# EAGLE board pcb_final (EAGLE 9.6.2)
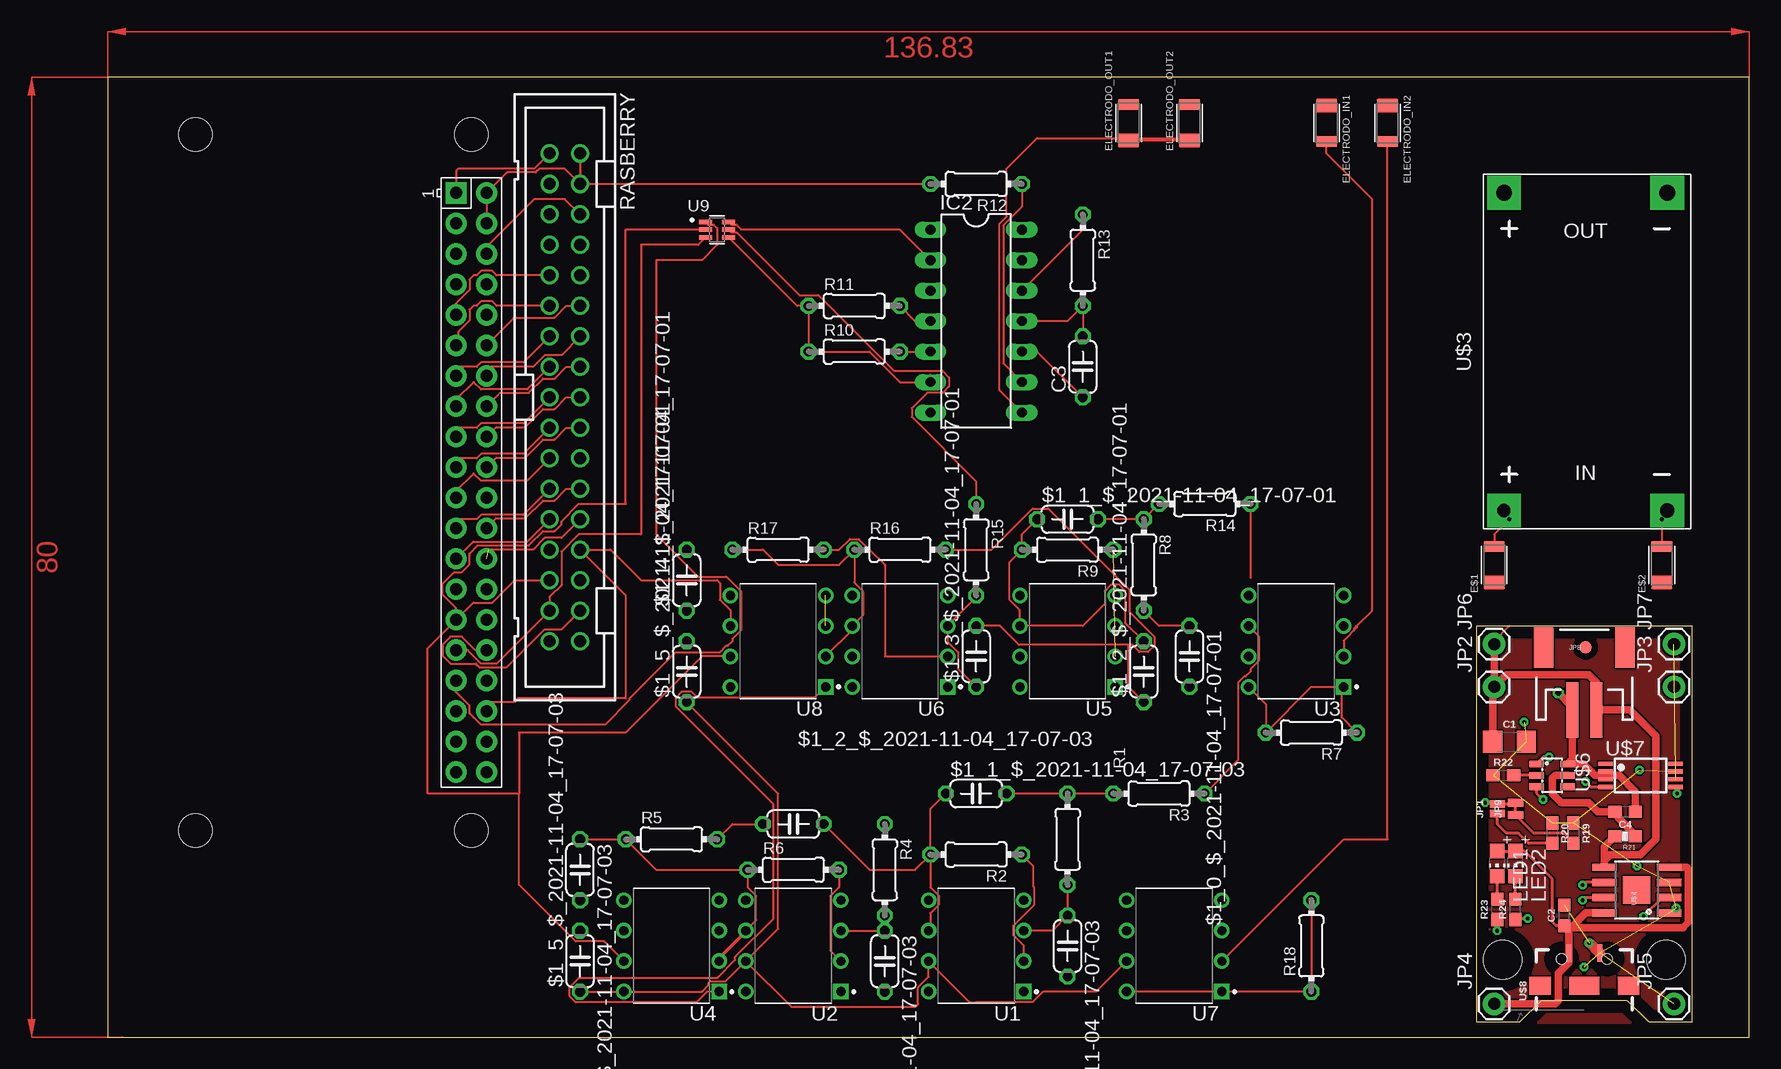
[diagram p0: board, top side]
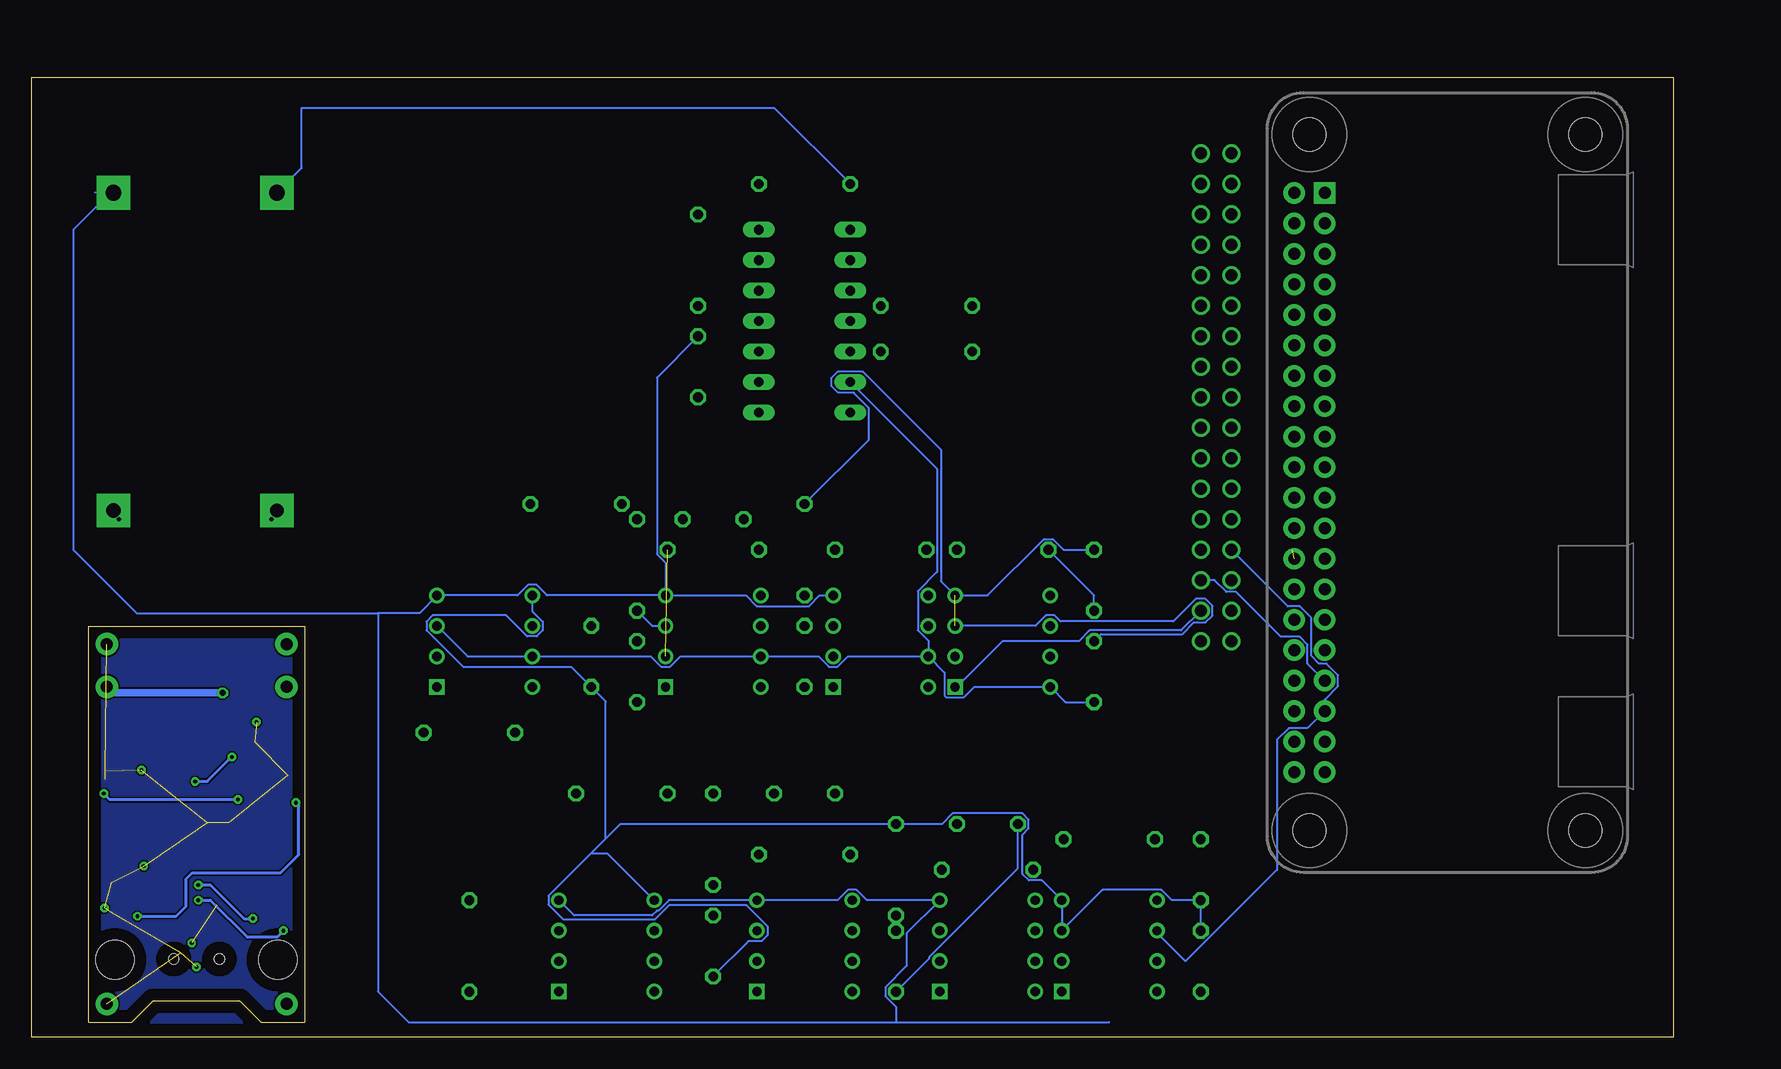
[diagram p1: board, bottom side, seen from below]

Size 136.83 x 80 mm. Coordinates in mm from the lower left corner, seen from the top.
Outline: 0,0 136.83,0 136.83,80 0,80 0,0
Outline: 132.08,1.27 132.08,34.27 114.08,34.27 114.08,1.27 117.68,1.27 119.48,3.07 126.68,3.07 128.48,1.27 132.08,1.27
Copper layers (1*16): Top 0.035mm / dielectric 1.5mm / Bottom 0.035mm
Design rules "default": minimum track width 6mil, minimum drill 0.35mm, track to track 6mil, track to pad 6mil, pad to pad 6mil, via to via 6mil, smd to smd 6mil, copper to edge 40mil, drill to drill 6mil, minimum pad ring 10mil, minimum via ring 8mil, stop-mask expansion 4mil, vias tented up to drill 0mil, thermal gap 10mil
Holes 3.2 mm at 129.88,6.47 116.28,6.47

## Footprints (pad centres in the part's own frame; a part is rotated, then mirrored left to right if it is on the bottom)
C050-024X044 = drill 0.813 octagon: 1 -2.54,0; 2 2.54,0
1206 = smd 1.6 x 1.8: 1 -1.4,0; 2 1.4,0
0603 = smd 1.1 x 1: 1 -0.85,0; 2 0.85,0
RESC3115X65N_1623693-1 = smd 1.09 x 1.77: 1 -1.465,0 | smd 0.94 x 1.77: 2 1.54,0
ICL8038 = drill 0.813 long: 1 -7.62,-3.81; 2 -5.08,-3.81; 3 -2.54,-3.81; 4 0,-3.81; 5 2.54,-3.81; 6 5.08,-3.81; 7 7.62,-3.81; 8 7.62,3.81; 9 5.08,3.81; 10 2.54,3.81; 11 0,3.81; 12 -2.54,3.81; 13 -5.08,3.81; 14 -7.62,3.81
SMT-JUMPER_2_NO_NO-SILK = smd 0.635 x 1.27: 1 -0.406,0; 2 0.406,0
1X01 = drill 1.016 pad 1.88: 1 0,0
JST-2-SMD = smd 1 x 4.6: 1 -1,-3.7; 2 1,-3.7 | smd 1.6 x 3.4: NC1 -3.4,1.5; NC2 3.4,1.5
SMT-JUMPER_2_NC_TRACE_NO-SILK = smd 0.635 x 1.27: 1 -0.508,0; 2 0.508,0
CHIP-LED0805 = smd 1.2 x 1.2: A 0,-1.05; C 0,1.05
0204/7 = drill 0.813 octagon: 1 -3.81,0; 2 3.81,0
0603-RES = smd 1.1 x 1: 1 -0.85,0; 2 0.85,0
PAK100/2500-34 = drill 1 pad 1.422: 1 -20.32,-1.27; 2 -20.32,1.27; 3 -17.78,-1.27; 4 -17.78,1.27; 5 -15.24,-1.27; 6 -15.24,1.27; 7 -12.7,-1.27; 8 -12.7,1.27; 9 -10.16,-1.27; 10 -10.16,1.27; 11 -7.62,-1.27; 12 -7.62,1.27; 13 -5.08,-1.27; 14 -5.08,1.27; 15 -2.54,-1.27; 16 -2.54,1.27; 17 0,-1.27; 18 0,1.27; 19 2.54,-1.27; 20 2.54,1.27; 21 5.08,-1.27; 22 5.08,1.27; 23 7.62,-1.27; 24 7.62,1.27; 25 10.16,-1.27; 26 10.16,1.27; 27 12.7,-1.27; 28 12.7,1.27; 29 15.24,-1.27; 30 15.24,1.27; 31 17.78,-1.27; 32 17.78,1.27; 33 20.32,-1.27; 34 20.32,1.27
DIP794W45P254L959H508Q8 = drill 0.78 pad 1.13 square: 1 -3.97,3.81 | drill 0.78 pad 1.13: 2 -3.97,1.27; 3 -3.97,-1.27; 4 -3.97,-3.81; 5 3.97,-3.81; 6 3.97,-1.27; 7 3.97,1.27; 8 3.97,3.81
SOT65P210X110-6N = smd 1.19 x 0.4: 1 -0.96,0.65; 2 -0.96,0; 3 -0.96,-0.65; 4 0.96,-0.65; 5 0.96,0; 6 0.96,0.65
RASPBERRYPI_BASTELSTUBE_V13_RASPI_BOARD_B+_FULL = drill 1 pad 1.778 square: 1 8.37,25.23 | drill 1 pad 1.778: 2 8.37,27.77; 3 10.91,25.23; 4 10.91,27.77; 5 13.45,25.23; 6 13.45,27.77; 7 15.99,25.23; 8 15.99,27.77; 9 18.53,25.23; 10 18.53,27.77; 11 21.07,25.23; 12 21.07,27.77; 13 23.61,25.23; 14 23.61,27.77; 15 26.15,25.23; 16 26.15,27.77; 17 28.69,25.23; 18 28.69,27.77; 19 31.23,25.23; 20 31.23,27.77; 21 33.77,25.23; 22 33.77,27.77; 23 36.31,25.23; 24 36.31,27.77; 25 38.85,25.23; 26 38.85,27.77; 27 41.39,25.23; 28 41.39,27.77; 29 43.93,25.23; 30 43.93,27.77; 31 46.47,25.23; 32 46.47,27.77; 33 49.01,25.23; 34 49.01,27.77; 35 51.55,25.23; 36 51.55,27.77; 37 54.09,25.23; 38 54.09,27.77; 39 56.63,25.23; 40 56.63,27.77 | hole 2.75: 3.5,3.5; 3.5,26.5; 61.5,3.5; 61.5,26.5
DC-DC-STEP-UP-MT3608 = drill 1.1 pad 2.8 square: IN+ -13.24,6.81 | drill 1.2 pad 2.8 square: IN- -13.24,-6.81 | drill 1.3 pad 2.8 square: OUT+ 13.24,6.81; OUT- 13.24,-6.81
SOIC-8 = smd 0.61 x 2.057: 1 -2.07,-2.892; 2 -0.8,-2.892; 3 0.47,-2.892; 4 1.74,-2.892; 5 1.74,2.492; 6 0.47,2.492; 7 -0.8,2.492; 8 -2.07,2.492 | smd 2.286 x 2.286: EPAD -0.165,-0.2
FIDUCIAL_1MM = smd 1 x 1: 1 0,0
SOT23-6L = smd 0.55 x 1.2: 1 -0.95,-1.3; 2 0,-1.3; 3 0.95,-1.3; 4 0.95,1.3; 5 0,1.3; 6 -0.95,1.3
TSSOP8 = smd 1.2 x 0.35: 1 -2.925,0.975; 2 -2.925,0.325; 3 -2.925,-0.325; 4 -2.925,-0.975; 5 2.925,-0.975; 6 2.925,-0.325; 7 2.925,0.325; 8 2.925,0.975
USB-MICROB-POWERONLY = smd 1.45 x 0.4: GND 1.455,-1.3; VBUS 1.455,1.3 | smd 1.5 x 1.8: SHIELD1 -1.27,3.685; SHIELD2 -1.27,-3.685 | smd 1.5 x 2.5: SHIELD3 -1.27,0 | hole 0.85: 0.93,1.9; 0.93,-1.9

## Placement (x,y rotation side)
$1_0_$_2021-11-04_17-07-01  100p  [C050-024X044]  90.17,31.75 270 top
$1_0_$_2021-11-04_17-07-03  100p  [C050-024X044]  80.01,7.62 270 top
$1_1_$_2021-11-04_17-07-01  200p  [C050-024X044]  80.01,43.18 0 top
$1_1_$_2021-11-04_17-07-03  200p  [C050-024X044]  72.39,20.32 0 top
$1_2_$_2021-11-04_17-07-01  100p  [C050-024X044]  86.36,30.48 90 top
$1_2_$_2021-11-04_17-07-03  100p  [C050-024X044]  57.15,17.78 0 top
$1_3_$_2021-11-04_17-07-01  100p  [C050-024X044]  72.39,31.75 90 top
$1_3_$_2021-11-04_17-07-03  100p  [C050-024X044]  64.77,6.35 270 top
$1_4_$_2021-11-04_17-07-01  100n  [C050-024X044]  48.26,38.1 90 top
$1_4_$_2021-11-04_17-07-03  100n  [C050-024X044]  39.37,13.97 270 top
$1_5_$_2021-11-04_17-07-01  10u  [C050-024X044]  48.26,30.48 90 top
$1_5_$_2021-11-04_17-07-03  10u  [C050-024X044]  39.37,6.35 90 top
C1  10uF  [1206]  116.84,24.64 0 top
C2  1.0uF  [0603]  121.41,10.16 90 top
C3  1.3n  [C050-024X044]  81.28,55.88 90 top
C4  0.1uF  [0603]  126.49,18.8 180 top
E$1  [RESC3115X65N_1623693-1]  115.57,39.37 90 top
E$2  [RESC3115X65N_1623693-1]  129.54,39.37 90 top
ELECTRODO_IN1  1623693-1  [RESC3115X65N_1623693-1]  101.6,76.2 270 top
ELECTRODO_IN2  1623693-1  [RESC3115X65N_1623693-1]  106.68,76.2 270 top
ELECTRODO_OUT1  1623693-1  [RESC3115X65N_1623693-1]  85.09,76.2 90 top
ELECTRODO_OUT2  1623693-1  [RESC3115X65N_1623693-1]  90.17,76.2 90 top
IC2  ICL8038  [ICL8038]  72.39,59.69 270 top
JP1  JUMPER NO  [SMT-JUMPER_2_NO_NO-SILK]  115.82,19.05 90 top
JP2  BAT  [1X01]  115.57,29.21 90 top
JP3  GND-BAT  [1X01]  130.56,29.21 90 top
JP4  IN+  [1X01]  115.57,2.79 90 top
JP5  IN-  [1X01]  130.56,2.79 90 top
JP6  OUT+  [1X01]  115.57,32.77 90 top
JP7  OUT-  [1X01]  130.56,32.77 90 top
JP8  JST  [JST-2-SMD]  123.08,30.99 0 top
JP9  JUMPER NC  [SMT-JUMPER_2_NC_TRACE_NO-SILK]  117.35,19.05 90 top
LED1  red  [CHIP-LED0805]  115.82,14.48 180 top
LED2  green  [CHIP-LED0805]  117.35,14.48 180 top
R1  1.8k  [0204/7]  80.01,16.51 270 top
R2  2.6k  [0204/7]  72.39,15.24 180 top
R3  1.8k  [0204/7]  87.63,20.32 180 top
R4  45k  [0204/7]  64.77,13.97 270 top
R5  22.5k  [0204/7]  46.99,16.51 0 top
R6  22.5k  [0204/7]  57.15,13.97 0 top
R7  250  [0204/7]  100.33,25.4 180 top
R8  1.8k  [0204/7]  86.36,39.37 270 top
R9  2.6k  [0204/7]  80.01,40.64 180 top
R10  4k  [0204/7]  62.23,57.15 0 top
R11  4k  [0204/7]  62.23,60.96 0 top
R12  10k  [0204/7]  72.39,71.12 180 top
R13  81k  [0204/7]  81.28,64.77 270 top
R14  1.8k  [0204/7]  91.44,44.45 180 top
R15  45k  [0204/7]  72.39,40.64 270 top
R16  22.5k  [0204/7]  66.04,40.64 0 top
R17  22.5k  [0204/7]  55.88,40.64 0 top
R18  250  [0204/7]  100.33,7.62 90 top
R19  2.4k  [0603]  122.17,17.02 270 top
R20  4.7k  [0603]  120.4,17.02 270 top
R21  100  [0603-RES]  126.49,16.76 180 top
R22  1k  [0603]  116.33,21.84 0 top
R23  330  [0603]  115.82,10.67 90 top
R24  330  [0603]  117.35,10.67 90 top
RASBERRY  2534-  [PAK100/2500-34]  38.1,53.34 270 top
U1  UA741CP  [DIP794W45P254L959H508Q8]  72.39,7.62 180 top
U2  UA741CP  [DIP794W45P254L959H508Q8]  57.15,7.62 180 top
U3  INA114AP  [DIP794W45P254L959H508Q8]  99.06,33.02 180 top
U4  ADC0831CCN  [DIP794W45P254L959H508Q8]  46.99,7.62 180 top
U5  UA741CP  [DIP794W45P254L959H508Q8]  80.01,33.02 180 top
U6  UA741CP  [DIP794W45P254L959H508Q8]  66.04,33.02 180 top
U7  INA114AP  [DIP794W45P254L959H508Q8]  88.9,7.62 180 top
U8  ADC0831CCN  [DIP794W45P254L959H508Q8]  55.88,33.02 180 top
U9  DAC5311IDCKRQ1  [SOT65P210X110-6N]  50.8,67.31 0 top
U$1  RPI-ZERO  [RASPBERRYPI_BASTELSTUBE_V13_RASPI_BOARD_B+_FULL]  3.81,78.74 270 top
U$3  DC-DC-STEP-UP-MT3608  [DC-DC-STEP-UP-MT3608]  123.19,57.15 90 top
U$4  DIO5158  [SOIC-8]  127.25,12.45 90 top
U$5  FIDUCIAL  [FIDUCIAL_1MM]  123.19,32.51 90 top
U$6  DW01-P  [SOT23-6L]  120.4,21.84 270 top
U$7  FS8205A  [TSSOP8]  127.76,21.84 0 top
U$8  USB-MICROB-POWERONLY  [USB-MICROB-POWERONLY]  123.08,5.59 90 top
U$9  [LOGO-3MM]  130.48,24.27 90 top
U$10  [E-R.IO-3MM]  131.48,24.27 90 top
U$11  [OSH-3MM]  122.28,12.07 90 top
U$12  [LOGO-BACK-6MM]  121.68,14.87 90 top
U$13  [E-R.IO-BACK-6MM]  123.68,14.87 90 top

## Library data of the parts
$1_0_$_2021-11-04_17-07-01 $1_0_$_2021-11-04_17-07-03 $1_1_$_2021-11-04_17-07-01 $1_1_$_2021-11-04_17-07-03 $1_2_$_2021-11-04_17-07-01 $1_2_$_2021-11-04_17-07-03 $1_3_$_2021-11-04_17-07-01 $1_3_$_2021-11-04_17-07-03 $1_4_$_2021-11-04_17-07-01 $1_4_$_2021-11-04_17-07-03 $1_5_$_2021-11-04_17-07-01 $1_5_$_2021-11-04_17-07-03 C3 = rcl; SPICEPREFIX: C
C1 = SparkFun-Capacitors; PROD_ID: CAP-10057
C2 = SparkFun-Capacitors; PROD_ID: CAP-00868
C4 = SparkFun-Capacitors; PROD_ID: CAP-08604
E$1 E$2 = 1623693-1
ELECTRODO_IN1 ELECTRODO_IN2 ELECTRODO_OUT1 ELECTRODO_OUT2 = 1623693-1; AVAILABILITY: In Stock; COMMENT: 1623693-1; DESCRIPTION: Puente de 0 ohmios 0.25W, resistencia de chip de 1/4W 1206 (métrica 3216) - película gruesa; EU_ROHS_COMPLIANCE: Compliant with Exemptions; MF: TE Connectivity; MP: 1623693-1; PACKAGE: 1206; POWER_RATING: .25 W; PRICE: None; RESISTANCE: 0; TOLERANCE: 0%; VOLTAGE_RATING: 200 V
IC2 = ICL8038
JP1 JP9 = SparkFun-Jumpers
JP2-JP8 R21 U$7 = SparkFun
LED1 LED2 U$5 = adafruit
R1-R18 = rcl; SPICEPREFIX: R
R19 = SparkFun-Resistors; PROD_ID: RES-09568
R20 = SparkFun-Resistors; PROD_ID: RES-07857
R22 = SparkFun-Resistors; PROD_ID: RES-07856
R23 R24 = SparkFun-Resistors; PROD_ID: RES-00818
RASBERRY = con-3m; OC_FARNELL: unknown; OC_NEWARK: unknown
U1 U2 U5 U6 = UA741CP; DESCRIPTION: Amplificador operacional de uso general 8-PDIP 0 a 70; DIGI-KEY_PART_NUMBER: 296-29430-2-ND; MF: Texas Instruments; MP: UA741CP; PACKAGE: PDIP-8 Texas; PURCHASE-URL: https://pricing.snapeda.com/search/part/UA741CP/?ref=eda
U3 U7 = INA114AP; AVAILABILITY: In Stock; DESCRIPTION: 1-MHz, 50-? V, 11-nV/? Hz, 3mA-potencia, amplificador de instrumentación de precisión 8-PDIP; MF: Texas Instruments; MP: INA114AP; PACKAGE: PDIP-8 Texas; PRICE: None; PURCHASE-URL: https://pricing.snapeda.com/search/part/INA114AP/?ref=eda
U4 U8 = ADC0831CCN; AVAILABILITY: In Stock; DESCRIPTION: Convertidor A/D de E/S serie de 8 bits y 1 cc 8-PDIP -40 a 85; MF: Texas Instruments; MP: ADC0831CCN/NOPB; PACKAGE: PDIP-8 Texas; PRICE: None; PURCHASE-URL: https://pricing.snapeda.com/search/part/ADC0831CCN/NOPB/?ref=eda
U9 = DAC5311IDCKRQ1; AVAILABILITY: In Stock; DESCRIPTION: Automotriz de 8 bits, un solo canal, 80uA, 1.8V-5.5V DAC 6-SC70 -40 a 85; MF: Texas Instruments; MP: DAC5311IDCKRQ1; PACKAGE: SOT-SC70-6 Texas Instruments; PRICE: None; PURCHASE-URL: https://pricing.snapeda.com/search/part/DAC5311IDCKRQ1/?ref=eda
U$1 = RPI-Zero
U$3 = dc-dc-boost-2a-microusb-mt3608
U$4 U$8-U$13 = ERADIONICA
U$6 = lipo

## Nets
3V3@1: RASBERRY.1 U$1.1
3V3@2: RASBERRY.17 U$1.17
5V0@2: $1_5_$_2021-11-04_17-07-01.1 $1_5_$_2021-11-04_17-07-03.1 IC2.6 R10.1 R11.1 U1.7 U2.7 U3.3 U3.7 U4.8 U5.7 U6.7 U7.7 U8.8 U9.4
BAT: C1.1 JP2.1 JP6.1 JP8.2 R21.2 U$4.5
CHRG: R23.1 U$4.7
DONE: R24.1 U$4.6
GND: $1_0_$_2021-11-04_17-07-01.2 $1_0_$_2021-11-04_17-07-03.2 $1_4_$_2021-11-04_17-07-03.2 $1_5_$_2021-11-04_17-07-03.2 R4.1 U3.5 U4.3 U4.4 U7.5
GND-ISO: C4.1 JP3.1 JP8.1 U$6.6 U$7.2 U$7.3
GND@1: RASBERRY.9 U$1.9
GND@2: RASBERRY.25 U$1.25
GND@4: RASBERRY.14 U$1.14
GND@5: RASBERRY.20 U$1.20
GND@8: RASBERRY.6 U$1.6
ISET: JP1.2 JP9.2 U$4.2
LED1: LED1.C R23.2
LED2: LED2.C R24.2
N$1: $1_1_$_2021-11-04_17-07-03.2 R1.1 R3.2
N$2: $1_0_$_2021-11-04_17-07-03.1 R1.2 U1.3
N$3: R2.1 U1.2
N$4: $1_4_$_2021-11-04_17-07-03.1 R5.1 R6.1 U2.6 U4.2
N$5: R7.1 R7.2 U3.1 U3.8
N$6: $1_1_$_2021-11-04_17-07-03.1 $1_2_$_2021-11-04_17-07-03.2 R2.2 U1.6
N$7: $1_2_$_2021-11-04_17-07-03.1 $1_3_$_2021-11-04_17-07-03.2 R5.2
N$8: $1_3_$_2021-11-04_17-07-03.1 R4.2 U2.3
N$9: R6.2 U2.2
N$10: R3.1 U3.6
N$11: $1_1_$_2021-11-04_17-07-01.2 R8.1 R14.2
N$12: $1_0_$_2021-11-04_17-07-01.1 R8.2 U5.3
N$13: RASBERRY.29 U4.7 U8.7 U9.2 U$1.29
N$14: RASBERRY.11 U$1.11
N$15: R9.1 U5.2
N$16: $1_1_$_2021-11-04_17-07-01.1 $1_2_$_2021-11-04_17-07-01.2 R9.2 U5.6
N$17: $1_2_$_2021-11-04_17-07-01.1 $1_3_$_2021-11-04_17-07-01.2 R16.2
N$18: $1_3_$_2021-11-04_17-07-01.1 R15.2 U6.3
N$19: R17.2 U6.2
N$20: IC2.4 R11.2
N$21: IC2.5 R10.2
N$22: C3.1 IC2.10
N$23: IC2.9 R12.1
N$24: IC2.2 U9.6
N$25: ELECTRODO_OUT1.1 ELECTRODO_OUT2.1 IC2.8
N$26: IC2.12 R13.1
N$27: $1_4_$_2021-11-04_17-07-01.1 R16.1 R17.1 U6.6 U8.2
N$28: R18.1 R18.2 U7.1 U7.8
N$30: RASBERRY.27 U4.6 U$1.35
N$31: RASBERRY.15 U$1.15
N$32: RASBERRY.19 U$1.19
N$33: RASBERRY.28 U8.6 U$1.36
N$34: RASBERRY.31 U9.3 U$1.31
N$35: RASBERRY.30 U9.1 U$1.33
N$36: RASBERRY.21 U$1.21
N$37: RASBERRY.13 U$1.13
N$38: RASBERRY.23 U$1.23
N$39: RASBERRY.24 U$1.24
N$40: RASBERRY.26 U$1.26
N$41: RASBERRY.12 U$1.12
N$42: RASBERRY.16 U$1.16
N$43: RASBERRY.18 U$1.18
N$44: RASBERRY.32 U4.1 U8.1 U$1.32
N$45: JP9.1 R19.2
N$46: JP1.1 R20.2
N$47: R22.2 U$6.2
N$48: U$6.3 U$7.5
N$53: C3.2 IC2.11 R13.2 U1.4 U2.4 U3.4 U5.4 U6.4 U7.4 U$3.OUT-
N$54: ELECTRODO_IN2.2 U7.2
N$57: ELECTRODO_IN1.2 U3.2
OD: U$6.1 U$7.4
S$1: $1_4_$_2021-11-04_17-07-01.2 $1_5_$_2021-11-04_17-07-01.2 R15.1 U8.3 U8.4 U9.5
S$2: R12.2 RASBERRY.2 RASBERRY.4 U$1.2 U$1.4 U$3.OUT+
S$3: C1.2 C2.2 JP5.1 JP7.1 R19.1 R20.1 R22.1 U$4.1 U$4.3 U$7.6 U$7.7 U$8.GND
S$4: R14.1
VCC: C2.1 JP4.1 LED1.A LED2.A U$4.4 U$4.8 U$8.VBUS
VCC-DW: C4.2 R21.1 U$6.5

## Tracks (layer width: path | path; a pad name or v marks a point on that pad's centre or on a via)
3V3@1
  Top 0.152: RASBERRY.1 35.56,72.39 29.21,72.39 29.04,72.22 U$1.1
3V3@2
  Top 0.152: RASBERRY.17 34.66,51.17 31.12,51.17 30.75,50.8 29.21,50.8 29.04,50.63 U$1.17
5V0@2
  Top 0.152: U9.4 57.46,60.96 R11.1 R10.1 63.5,57.15 66.04,54.61 IC2.6 68.58,55.23 | $1_5_$_2021-11-04_17-07-03.1 U4.8 49.53,3.81 50.09,4.37 50.09,4.55 50.22,4.68 51.51,4.68 U2.7 | $1_5_$_2021-11-04_17-07-01.1 55.88,20.32 55.88,9.05 U2.7 | U2.7 56.99,2.54 67.31,2.54 67.55,2.78 67.55,4.17 68.42,5.04 U1.7 71.83,2.94 72.39,2.94 77.1,2.94 77.97,3.81 82.39,3.81 U7.7
  Bottom 0.152: U6.7 62.07,33.06 62.94,33.93 62.94,37.19 61.34,38.79 61.34,47.37 IC2.6 | U6.7 60.72,30.4 60.72,28.47 60.59,28.34 59.11,28.34 58.24,29.21 U8.8 50.64,27.94 $1_5_$_2021-11-04_17-07-01.1 | U6.7 68.78,31.75 69.65,30.88 70.37,30.88 71.24,31.75 U5.7 82.75,31.75 83.62,30.88 84.34,30.88 85.21,31.75 U3.7 100.49,31.75 U3.3
BAT
  Top 0.61: U$4.5 124.76,14.73 | 124.76,14.73 124.76,15.88 R21.2 | 124.76,14.73 125.27,15.24 127.76,15.24 129.03,16.51 129.03,25.15 126.89,27.29 JP8.2 124.08,29.59 123.44,30.23 116.59,30.23 JP2.1 | C1.1 115.44,29.08 JP2.1 | JP6.1 JP2.1
CHRG  (via drill 0.3)
  Top 0.254: U$4.7 123.15,11.65 v122.94,11.43 | v115.82,8.89 R23.1
  Bottom 0.254: v122.94,11.43 121.92,11.43 118.87,8.38 116.33,8.38 v115.82,8.89
DONE  (via drill 0.3)
  Top 0.254: U$4.6 123.15,12.92 v122.94,12.7 | v118.36,9.91 117.44,9.91 R24.1
  Bottom 0.254: v122.94,12.7 121.92,12.7 119.13,9.91 v118.36,9.91
GND
  Bottom 0.152: $1_5_$_2021-11-04_17-07-03.2 $1_4_$_2021-11-04_17-07-03.2 41.79,11.43 42.66,12.3 47.55,12.3 50.88,8.97 | 50.88,8.97 U4.3 | 50.88,8.97 50.96,9.05 U4.4 52.61,13.08 53.71,13.08 54.23,13.6 54.23,16.9 53.72,17.41 53.72,18.15 54.24,18.67 60.06,18.67 60.95,17.78 R4.1 87.75,17.78 88.96,16.57 | $1_0_$_2021-11-04_17-07-03.2 77.07,8.02 76,8.02 75.49,8.53 75.49,9.25 77.28,11.05 83.65,11.05 84.84,9.86 92.53,9.86 93.74,11.07 93.74,11.79 90.23,15.3 | 88.96,16.57 90.23,15.3 | 88.96,16.57 88.96,28 $1_0_$_2021-11-04_17-07-01.2 91.84,30.88 100.85,30.88 103.9,33.93 103.9,34.65 103.39,35.16 97.27,35.16 95.52,33.42 94.73,33.42 94.22,33.93 94.22,34.65 95.09,35.52 U3.5 | U7.5 88.8,15.3 90.23,15.3
  pour Bottom (no thermals): 132.08,1.27 132.08,34.27 114.08,34.27 114.08,1.27
  pour Top (no thermals): 114.08,1.27 132.08,1.27 132.08,34.27 114.08,34.27
GND-ISO  (via drill 0.5)
  Top 0.254: 125.22,21.84 125.17,21.84 U$7.3
  Top 0.4: 124.51,21.84 U$7.3 U$7.2
  Top 0.61: 124.51,21.84 123.95,21.84 123.01,22.79 U$6.6 122.08,23.17 JP8.1 122.08,27.53 v120.9,28.7 | C4.1 127.34,20.49 125.98,21.84 125.22,21.84
  Bottom 0.61: v120.9,28.7 130.05,28.7 JP3.1
GND@1
  Top 0.152: RASBERRY.9 32.41,63.5 32.04,63.87 31.12,63.87 30.75,63.5 30.48,63.5 30.16,63.18 30.16,62.29 29.04,61.17 U$1.9
GND@2
  Top 0.152: U$1.25 30.46,41.31 34.96,41.31 RASBERRY.25
GND@4
  Top 0.152: RASBERRY.14 37.81,56.86 36.42,56.86 35.44,55.88 31.75,55.88 31.58,55.71 U$1.14
GND@5
  Top 0.152: U$1.20 32.39,48.32 34.78,48.32 36.28,49.82 37.24,49.82 38.22,50.8 RASBERRY.20
GND@8
  Top 0.152: RASBERRY.6 38.1,69.85 35.56,69.85 31.58,65.87 U$1.6
ISET  (via drill 0.3)
  Top 0.254: U$4.2 129.57,11.65 v128.02,10.1 | v114.81,19.56 115.72,19.56 JP1.2 117.25,19.46 JP9.2
  Bottom 0.254: v128.02,10.1 124.78,10.1 123.95,10.92 123.95,13.21 123.44,13.72 116.08,13.72 114.55,15.24 114.55,19.3 v114.81,19.56
LED1
  Top 0.254: R23.2 LED1.C
LED2
  Top 0.254: R24.2 LED2.C
N$1
  Top 0.152: R3.2 R1.1 $1_1_$_2021-11-04_17-07-03.2
N$2
  Top 0.152: R1.2 $1_0_$_2021-11-04_17-07-03.1 78.74,8.89 U1.3
N$3
  Top 0.152: U1.2 76.36,7.62 | 76.36,7.62 76.36,7.66 | R2.1 77.17,14.28 77.17,12.57 77.23,12.51 77.23,11.07 75.49,9.32 75.49,8.49 76.36,7.62
N$4
  Top 0.152: $1_4_$_2021-11-04_17-07-03.1 R5.1 45.72,13.97 R6.1 53.34,12.5 54.05,11.79 54.05,9.76 53.26,8.97 50.96,6.67 | U2.6 53.18,8.73 50.8,6.35 50.8,6.51 50.96,6.67 | U4.2 50.96,6.67
N$5
  Top 0.152: U3.8 96.52,27.78 R7.2 100.33,29.21 102.87,29.21 | 102.87,29.21 U3.1 | R7.1 102.87,26.67 102.87,29.21
N$6
  Top 0.152: $1_2_$_2021-11-04_17-07-03.2 63.5,13.97 67.31,13.97 R2.2 | R2.2 68.58,19.05 $1_1_$_2021-11-04_17-07-03.1 | R2.2 68.58,12.5 69.29,11.79 69.29,11.07 68.58,10.36 68.58,8.89 U1.6
N$7
  Top 0.152: R5.2 52.07,17.78 $1_2_$_2021-11-04_17-07-03.1
  Bottom 0.152: $1_3_$_2021-11-04_17-07-03.2 61.99,6.59 61.99,6.71 54.61,14.09 $1_2_$_2021-11-04_17-07-03.1
N$8
  Top 0.152: U2.3 $1_3_$_2021-11-04_17-07-03.1 R4.2
N$9
  Top 0.152: R6.2 60.96,12.5 60.25,11.79 60.25,7.22 U2.2
N$10
  Top 0.152: U3.6 95.96,33.42 95.96,31.39 95.25,30.68 95.25,30.48 94.85,30.08 94.73,30.08 94.22,29.57 94.22,23.1 R3.1
N$11
  Top 0.152: R14.2 R8.1 $1_1_$_2021-11-04_17-07-01.2
N$12
  Top 0.152: $1_0_$_2021-11-04_17-07-01.1 87.63,34.29 R8.2
  Bottom 0.152: R8.2 85.09,34.29 U5.3
N$13
  Top 0.152: U9.2 43.18,67.31 43.18,44.45 39.25,44.45 37.81,43.01 37.81,42.77 37.24,42.2 36.28,42.2 35.09,41.01 30.85,41.01 30.16,40.32 30.16,39.43 29.5,38.77 28.88,38.77 27.92,37.81 27.92,36.89 29.04,35.77 U$1.29 | U8.7 49.53,31.75 43.18,25.4 34.29,25.4 34.29,20.32 | 34.29,20.32 26.67,20.32 26.67,32.44 U$1.29 | U$1.29 30.46,36.23 32.04,36.23 33.91,38.1 RASBERRY.29 | U4.7 41.37,8 39,8 34.29,12.71 34.29,20.32
N$14
  Top 0.152: RASBERRY.11 32.41,60.96 32.04,61.33 31.12,61.33 30.75,60.96 30.48,60.96 30.16,60.64 30.16,59.75 29.21,58.8 29.21,57.84 U$1.11
N$15  (1 unrouted)
N$16
  Top 0.152: $1_2_$_2021-11-04_17-07-01.2 84.85,34.53 84.85,37.19 84.34,37.7 83.62,37.7 83.11,37.19 83.11,36.12 81.28,34.29 U5.6 76.04,35.6 75.17,36.47 75.17,39.61 R9.2 76.2,41.91 $1_1_$_2021-11-04_17-07-01.1
N$17
  Top 0.152: $1_3_$_2021-11-04_17-07-01.2 74.38,34.29 75.95,32.72 85.09,32.72 | 85.09,32.72 85.41,32.72 85.99,32.13 86.73,32.13 87.25,32.65 87.25,33.39 85.16,35.48 85.16,37.32 78.41,44.07 77.1,44.07 73.67,40.64 R16.2 | $1_2_$_2021-11-04_17-07-01.1 85.09,29.21 85.09,32.72
N$18
  Top 0.152: $1_3_$_2021-11-04_17-07-01.1 70.88,30.72 70.88,32.11 70.01,32.98 U6.3 72.39,36.67 R15.2
N$19
  Top 0.152: R17.2 60.97,40.64 61.86,41.53 62.6,41.53 63.49,40.64 63.5,40.64 64.77,39.37 64.77,31.75 U6.2
N$20
  Top 0.152: IC2.4 67.31,59.69 R11.2
N$21
  Top 0.152: R10.2 IC2.5
N$22
  Top 0.152: IC2.10 77.47,57.15 C3.1
N$23
  Top 0.152: R12.1 76.2,69.23 74.65,67.68 74.65,56.16 IC2.9
N$24
  Top 0.152: U9.6 51.98,67.74 52.42,67.74 52.85,67.31 66.04,67.31 IC2.2
N$25
  Top 0.152: IC2.8 74.35,53.92 74.35,67.8 74.93,68.39 74.93,72.39 77.47,74.93 89.97,74.93 ELECTRODO_OUT2.1 ELECTRODO_OUT1.1
N$26
  Top 0.152: R13.1 81.28,67.31 IC2.12
N$27
  Top 0.152: R17.1 54.61,40.64 55.88,39.37 60.96,39.37 R16.1 62.23,37.9 62.94,37.19 62.94,35.16 U6.6 62.07,33.97 U8.2
  Bottom 0.152: $1_4_$_2021-11-04_17-07-01.1 48.26,36.83 R17.1
N$28
  Top 0.152: U7.8 U7.1 R18.1 R18.2
N$30
  Bottom 0.152: RASBERRY.27 32.12,35.93 31.12,35.93 30.16,34.97 30.16,31.81 29.5,31.15 28.88,31.15 27.92,30.19 27.92,29.27 29.04,28.15 U$1.35 30.46,25.77 32.04,25.77 33.02,24.79 33.02,13.97 40.64,6.35 43.02,8.73 U4.6
N$31
  Top 0.152: RASBERRY.15 34.96,54.01 31.12,54.01 30.52,54.61 30.48,54.61 29.04,53.17 U$1.15
N$32
  Top 0.152: RASBERRY.19 34.66,48.63 31.12,48.63 30.75,48.26 29.21,48.26 29.04,48.09 U$1.19
N$33
  Top 0.152: U8.6 51.91,35.6 51.04,36.47 51.04,37.86 50.8,38.1 44.45,38.1 41.91,40.64 RASBERRY.28 43.18,36.83 43.18,28.25 34.16,28.25 33.86,27.94 31.75,27.94 31.58,27.77 U$1.36
N$34
  Top 0.152: U9.3 49.22,66.04 44.45,66.04 44.45,41.91 39.25,41.91 37.81,40.47 37.81,37.69 36.83,36.71 RASBERRY.31 32.42,31.15 31.12,31.15 30,32.27 U$1.31
N$35
  Top 0.152: U9.1 50.06,67.74 50.5,67.74 50.8,67.44 50.8,66.04 49.53,64.77 45.72,64.77 45.72,41.91 49.23,38.41 51.57,38.41 52.78,37.19 52.78,33.93 52.07,33.22 52.07,33.02 51.67,32.62 51.55,32.62 50.98,32.05 47.3,32.05 43.48,28.25 43.48,28.12 41.44,26.07 31.12,26.07 30.52,26.67 30.48,26.67 30.16,26.99 30.16,27.65 29.04,28.77 U$1.33
  Bottom 0.152: U$1.33 30.46,31.15 30.46,32.73 31.12,33.39 32.7,33.39 36.43,37.12 37.24,37.12 38.22,38.1 RASBERRY.30
N$36
  Top 0.152: RASBERRY.21 34.96,46.39 31.12,46.39 30.52,46.99 30.48,46.99 29.04,45.55 U$1.21
N$37
  Top 0.152: RASBERRY.13 34.66,56.25 31.12,56.25 30.75,55.88 29.21,55.88 29.04,55.71 U$1.13
N$38
  Top 0.152: RASBERRY.23 34.66,43.55 31.12,43.55 30.75,43.18 29.21,43.18 29.04,43.01 U$1.23
N$39
  Top 0.152: U$1.24 32.39,43.24 34.78,43.24 36.28,44.74 37.24,44.74 38.22,45.72 RASBERRY.24
N$40  (1 unrouted)
  Top 0.152: RASBERRY.26 37.81,41.62 36.42,41.62 35.44,40.64 31.75,40.64
N$41
  Top 0.152: RASBERRY.12 38.22,60.96 37.24,59.98 33.89,59.98 U$1.12
N$42
  Top 0.152: U$1.16 32.7,53.71 35.09,53.71 36.28,54.9 37.24,54.9 38.22,55.88 RASBERRY.16
N$43
  Top 0.152: U$1.18 32.39,50.86 34.78,50.86 36.28,52.36 37.24,52.36 38.22,53.34 RASBERRY.18
N$44
  Top 0.152: U$1.32 30.62,32.27 29.5,33.39 28.58,33.39 27.92,32.73 27.92,31.81 28.58,31.15 30.69,31.15 30.99,30.85 33.27,30.85 36.42,34 37.81,34 RASBERRY.32 | U4.1 49.96,3.81 49.07,2.92 39,2.92 38.48,3.44 38.48,4.18 39.29,4.99 50.83,4.99 52.31,6.46 52.31,6.71 55.5,9.9 55.5,19.44 47.37,27.57 47.37,28.31 47.89,28.83 48.63,28.83 49.12,28.34 58.98,28.34 U8.1
  Bottom 0.152: RASBERRY.32 41.02,33.91 48.63,33.91 49.52,33.02 55.88,33.02 59.69,29.21 U8.1
N$45
  Top 0.254: R19.2 122.17,16.26 121.41,17.02 118.87,17.02 JP9.1
N$46
  Top 0.254: R20.2 118.45,16.17 117.6,17.02 116.59,17.02 115.82,17.78 JP1.1
N$47
  Top 0.254: U$6.2 R22.2
N$48  (via drill 0.3)
  Top 0.254: U$6.3 119.1,20.35 v119.63,19.81 | v130.81,20.32 130.81,20.74 U$7.5
  Bottom 0.254: v119.63,19.81 130.3,19.81 v130.81,20.32
N$49
  Top 0.152: 116.84,34.29 115.57,33.02
N$50  (via drill 0.35)
  other vias: 115.57,33.02
N$52  (via drill 0.35)
  other vias: 130.81,33.02
N$53
  Top 0.152: IC2.11 80.01,59.69 R13.2 C3.2
  Bottom 0.152: 131.54,70.39 U$3.OUT- 130.27,70.39 133.35,67.31 133.35,40.64 128.07,35.36 107.95,35.36 | 107.95,35.36 104.5,35.36 U3.4 96.32,36.83 95.45,37.7 94.73,37.7 93.86,36.83 U5.4 | 107.95,35.36 107.95,3.81 105.41,1.27 64.77,1.27 | 64.77,1.27 46.99,1.27 | 64.77,1.27 64.77,2.55 65.66,3.44 65.66,4.18 63.88,5.96 63.88,8.67 U2.4 67.19,11.43 68.06,12.3 68.78,12.3 69.65,11.43 U1.4 83.7,11.43 84.57,10.56 84.69,10.56 85.09,10.16 91.6,10.16 U7.4 | U5.4 83.98,39.54 84.71,40.27 84.71,54.99 C3.2 | U5.4 77.27,36.83 76.39,35.94 72.02,35.94 71.13,36.83 U6.4
N$54
  Top 0.152: U7.2 103.03,16.51 106.68,16.51 ELECTRODO_IN2.2
N$57
  Top 0.152: 103.9,33.93 103.9,34.05 104.14,34.29 | 104.14,34.29 105.41,35.56 105.41,69.85 101.6,73.66 ELECTRODO_IN1.2 | U3.2 103.03,33.06 104.14,34.17 104.14,34.29
OD  (via drill 0.3)
  Top 0.254: U$7.4 123.66,20.86 v123.19,21.34 | v120.14,23.37 119.68,23.37 U$6.1
  Bottom 0.254: v123.19,21.34 122.17,21.34 v120.14,23.37
S$1  (1 unrouted)
  Top 0.152: U9.5 51.98,67.09 52.42,67.09 57.66,61.85 59.23,61.85 65.54,55.54 69.57,55.54 70.13,54.98 70.13,54.24 69.61,53.72 68.31,53.72 67.03,52.44 67.03,51.7 72.39,46.34 R15.1
  Bottom 0.152: $1_4_$_2021-11-04_17-07-01.2 50.81,40.64 51.7,41.53 52.44,41.53 57.14,36.83 U8.4 61.04,38.02 61.04,48.98 67.55,55.5 69.61,55.5 70.13,54.98 70.13,54.24 69.61,53.72 68.31,53.72 67.03,52.44 67.03,49.81 R15.1 | U8.3 53.14,34.29 52.27,35.16 51.55,35.16 51.06,34.67 41.65,34.67 39.78,36.54 38.96,36.54 38.39,35.97 38.39,35.15 38.96,34.58 39.92,34.58 40.9,33.6 47.68,33.6 $1_5_$_2021-11-04_17-07-01.2
S$2
  Top 0.152: RASBERRY.2 RASBERRY.4 | RASBERRY.4 R12.2 | RASBERRY.4 38.1,72.39 35.99,72.39 35.69,72.08 33.3,72.08 U$1.2 U$1.4
  Bottom 0.152: U$3.OUT+ 114.3,72.47 114.3,77.47 74.93,77.47 R12.2
S$3  (via drill 0.3)  (16 unrouted)
  Top 0.813: U$8.GND 124.31,7.04 v123.48,7.87
  other vias: 123.08,5.87 130.75,10.79 127.48,14.27 118.08,26.27 127.68,22.27
S$4
  Top 0.152: R14.1 95.25,38.3
S$5  (via drill 0.35)
  Top 0.152: v116.84,43.18 115.57,41.91 115.57,40.64
S$6  (via drill 0.35)
  Top 0.152: v129.54,43.18 129.54,40.64
VCC
  Top 0.254: LED1.A LED2.A 117.38,15.49 118.11,15.49 120.4,13.21 120.4,9.65 120.74,9.31 C2.1
  Top 0.61: 121.78,8.94 U$8.VBUS 121.78,6.21 120.9,5.33 120.9,3.05 120.65,2.79 JP4.1 | 121.78,8.94 C2.1 121.58,9.14 131.32,9.14 131.76,9.65 131.76,13.97 131.61,14.19 U$4.4 | U$4.8 123.21,10.38 121.78,8.94
VCC-DW
  Top 0.61: R21.1 127.34,16.87 125.92,18.29 125.92,18.52 C4.2 124.21,18.8 123.44,19.56 121.16,19.56 120.4,20.32 120.4,21.59 120.65,21.84 U$6.5
(copper drawn outside any net)
  shapes: Top area x2

## Text on the board
top-01: OUT+ | OUT- | BAT+ | BAT- | JP1 | JP2 | CHRG | DONE | IN+ | IN-
208bmp: OUT+ | OUT- | BAT+ | BAT- | Lithium battery charger / with protection | IN+ | IN-